# Altium PCB HV_DAC_1PPM.PcbDoc (part 5 of 5)
Units mm, origin at the board's own origin, x right, y up, seen from the top; angles counter-clockwise.
Board outline 148 x 86 mm, 6 copper layers (Layer 1, Layer 2, Layer 3, Layer 4, Layer 5, Layer 6), stack 1.615 mm thick; 392 components, 227 nets, 1037 pads, 645 vias.
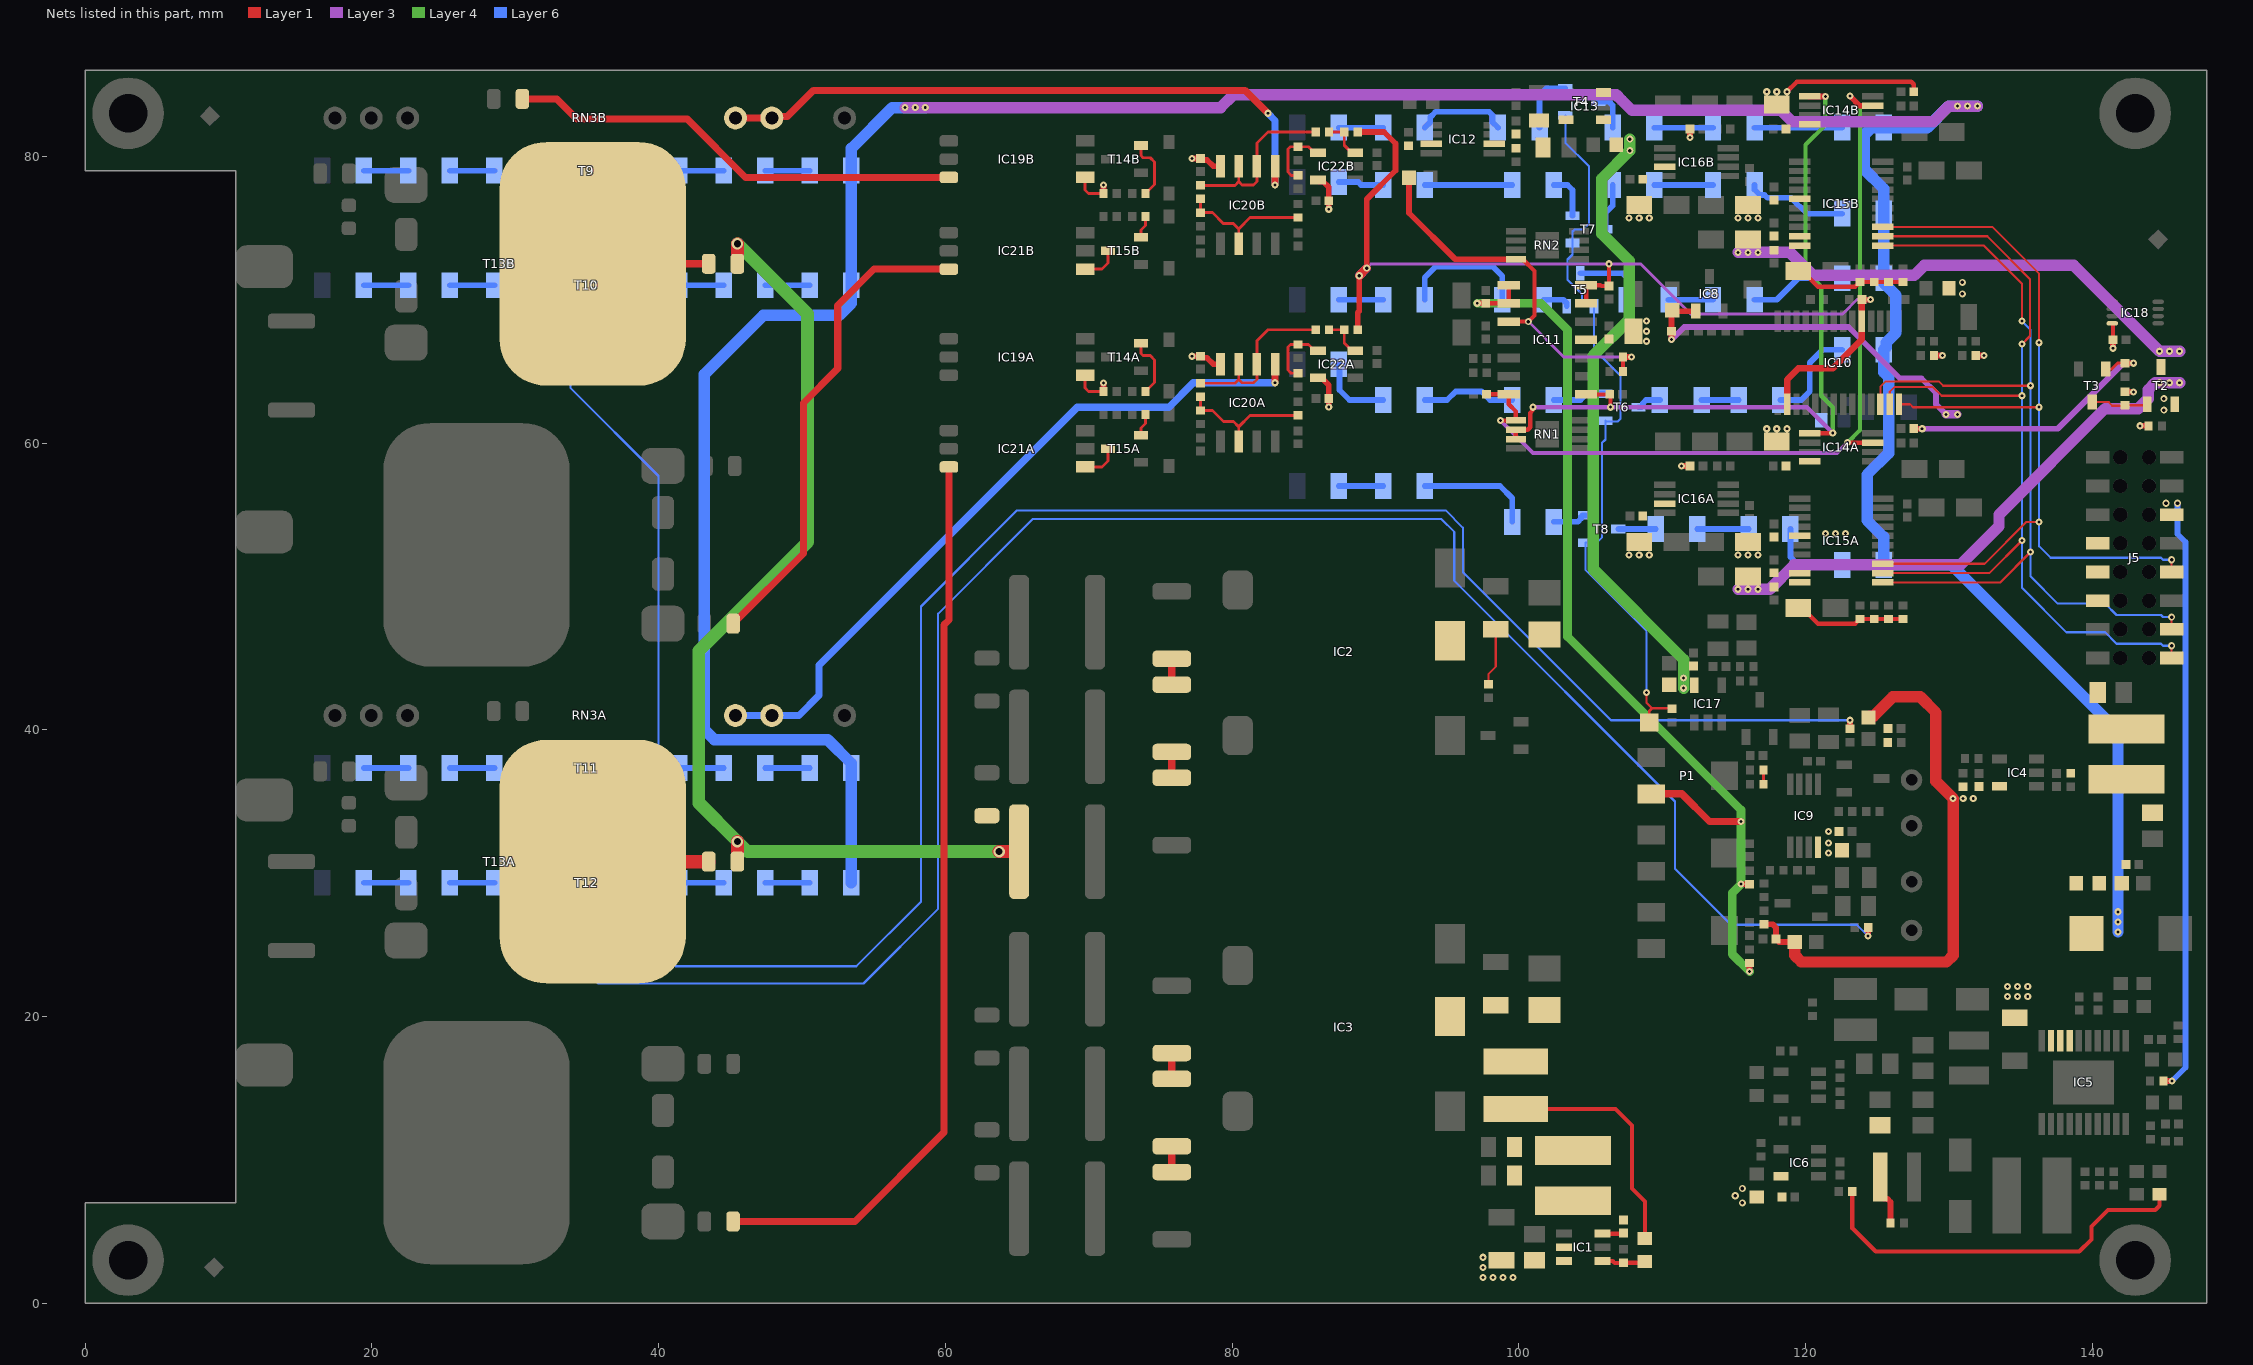
[diagram p7: the nets of this part, all layers, seen from the top]

## Via types
v1: diameter 0.5, hole 0.2, Layer 1 to Layer 6, tented both sides, 520 vias
v2: diameter 0.5, hole 0.25, Layer 1 to Layer 6, tented both sides, 74 vias
v3: diameter 0.8, hole 0.5, Layer 1 to Layer 6, tented both sides, 47 vias
v4: diameter 0.8, hole 0.5, Layer 1 to Layer 6, tented bottom, 2 vias
v5: diameter 0.5, hole 0.25, Layer 1 to Layer 6, tented bottom, 2 vias

## Nets (pads, with @x,y where several pads share a name; then routed paths per layer and width w, separated by ;. In a path a pad name is that pad's centre, name@x,y a point inside that pad or via, vN(x,y) a via of type N, cw(c..) or ccw(c..) an arc to the next point about the centre after c; other vN are vias at no path point) (continued)
NetIC19B_6: IC19B.6 R113B.1 | length 32
  Layer 1 w0.5: R113B.1@30.5,84 32.9,84 34.3,82.6 42,82.6 46.07,78.53 IC19B.6@60.25,78.53
NetIC20A_2: IC20A.2 R114A.2 R117A.1 R123A.2 | length 9.6
  Layer 1 w0.2: R123A.2@77.8,63.23 R114A.2@77.8,62.27 78.63,62.27 79.4,61.5 80.1,61.5 80.465,61.135 ; IC20A.2@80.465,60.1 80.465,61.135 ; R117A.1@84.6,61.93 81.26,61.93 80.465,61.135
NetIC20A_5: IC20A.5 RN3A.4 RN3A.5 | length 49.8
  Layer 1 w0.5: v1@83.005,64.205 IC20A.5@83.005,65.5
  Layer 6 w0.5: RN3A.4@45.36,41 RN3A.5@47.9,41 49.8,41 51.2,42.4 51.2,44.5 69.2,62.5 75.6,62.5 77.3,64.2 v1(83,64.2)
NetIC20A_6: IC20A.6 IC20A.7 R123A.1 R132A.2 | length 12.4
  Layer 1 w0.2: R123A.1@77.8,64.17 80.2,64.17 80.465,64.435 ; IC20A.7@80.465,65.5 80.465,64.435 ; R132A.2@85.83,67.9 82.5,67.9 81.735,67.135 IC20A.6@81.735,65.5 81.735,64.435 81.5,64.2 80.7,64.2 80.465,64.435
NetIC20B_2: IC20B.2 R114B.2 R117B.1 R123B.2 | length 9.6
  Layer 1 w0.2: R123B.2@77.8,77.03 R114B.2@77.8,76.07 78.63,76.07 79.4,75.3 80.1,75.3 80.465,74.935 ; IC20B.2@80.465,73.9 80.465,74.935 ; R117B.1@84.6,75.73 81.26,75.73 80.465,74.935
NetIC20B_5: IC20B.5 RN3B.4 RN3B.5 | length 45.1
  Layer 1 w0.5: RN3B.4@45.36,82.675 RN3B.5@47.9,82.675 48.009,82.784 48.984,82.784 50.8,84.6 80.9,84.6 v1(82.5,83) ; v1(83,78) 83.005,78.005 IC20B.5@83.005,79.3
  Layer 6 w0.5: v1(82.5,83) 83,82.5 v1(83,78)
NetIC20B_6: IC20B.6 IC20B.7 R123B.1 R132B.2 | length 12.4
  Layer 1 w0.2: R123B.1@77.8,77.97 80.2,77.97 80.465,78.235 ; IC20B.7@80.465,79.3 80.465,78.235 ; R132B.2@85.83,81.7 82.5,81.7 81.735,80.935 IC20B.6@81.735,79.3 81.735,78.235 81.5,78 80.7,78 80.465,78.235
NetIC21A_1: IC21A.1 T15A.3 | length 2.6
  Layer 1 w0.2: IC21A.1@69.75,58.33 70.93,58.33 71.35,58.75 T15A.3@71.35,59.6
NetIC21A_6: IC21A.6 R122A.2 | length 63.8
  Layer 1 w0.5: R122A.2@45.2,5.7 53.7,5.7 59.9,11.9 59.9,47.3 60.25,47.65 IC21A.6@60.25,58.33
NetIC21B_1: IC21B.1 T15B.3 | length 2.6
  Layer 1 w0.2: IC21B.1@69.75,72.13 70.93,72.13 71.35,72.55 T15B.3@71.35,73.4
NetIC21B_6: IC21B.6 R122B.2 | length 34
  Layer 1 w0.5: R122B.2@45.2,47.4 50.1,52.3 50.1,62.8 52.5,65.2 52.5,69.6 55.03,72.13 IC21B.6@60.25,72.13
NetIC22A_3: IC22A.3 R132A.1 R134A.1 | length 3
  Layer 1 w0.2: R132A.1@86.77,67.9 R134A.1@87.83,67.9 87.83,66.97 88.35,66.45 IC22A.3@88.6,66.45
NetIC22A_4: IC22A.4 R131A.2 R133A.1 | length 4.7
  Layer 1 w0.2: R133A.1@84.6,64.87 84.13,64.87 83.9,65.1 83.9,66.7 84.07,66.87 R131A.2@84.6,66.87 85.33,66.87 85.75,66.45 IC22A.4@86,66.45
NetIC22B_3: IC22B.3 R132B.1 R134B.1 | length 3
  Layer 1 w0.2: R132B.1@86.77,81.7 R134B.1@87.83,81.7 87.83,80.77 88.35,80.25 IC22B.3@88.6,80.25
NetIC22B_4: IC22B.4 R131B.2 R133B.1 | length 4.7
  Layer 1 w0.2: R133B.1@84.6,78.67 84.13,78.67 83.9,78.9 83.9,80.5 84.07,80.67 R131B.2@84.6,80.67 85.33,80.67 85.75,80.25 IC22B.4@86,80.25
NetR17_1: R17.1 T2.1 T3.3 | length 4
  Layer 1 w0.15: T3.3@140,62.85 141.15,62.85 141.4,62.6 142.27,62.6 R17.1@142.3,62.63 143.78,62.63 T2.1@143.85,62.7
NetR33_1: R33.1 R42.2 | length 6.1
  Layer 6 w0.4: R42.2@116.45,82 R33.1@122.55,82
NetR34_1: R34.1 R43.2 | length 6.7
  Layer 6 w0.4: R43.2@116.45,70 118,70 119.5,71.5 R34.1@122.55,71.5
NetR35_1: R35.1 R44.2 | length 6.9
  Layer 6 w0.4: R44.2@118.25,63 119.7,63 120.3,63.6 120.3,65.6 121.2,66.5 R35.1@122.55,66.5
NetR36_1: R36.1 R45.2 | length 7.1
  Layer 6 w0.4: R45.2@116.45,78 116.45,77.675 116.825,77.3 117.15,77.3 117.35,77.1 119,77.1 120.1,76 R36.1@122.55,76
NetR37_1: R37.1 R46.2 | length 5.8
  Layer 6 w0.4: R46.2@118.95,54 118.95,52.05 119.5,51.5 R37.1@122.55,51.5
NetR38_1: R38.1 R47.2 | length 3.1
  Layer 6 w0.4: R47.2@47.45,79 R38.1@50.55,79
NetR39_1: R39.1 R48.2 | length 3.1
  Layer 6 w0.4: R48.2@47.45,71 R39.1@50.55,71
NetR40_1: R40.1 R49.2 | length 3.1
  Layer 6 w0.4: R49.2@47.45,37.325 R40.1@50.55,37.325
NetR41_1: R41.1 R50.2 | length 3.1
  Layer 6 w0.4: R50.2@47.45,29.325 R41.1@50.55,29.325
NetR42_1: R42.1 R52.2 | length 4.1
  Layer 6 w0.4: R52.2@109.45,82 R42.1@113.55,82
NetR43_1: R43.1 R53.2 | length 3.1
  Layer 6 w0.4: R53.2@110.45,70 R43.1@113.55,70
NetR44_1: R44.1 R54.2 | length 2.6
  Layer 6 w0.4: R54.2@112.75,63 R44.1@115.35,63
NetR45_1: R45.1 R55.2 | length 4.1
  Layer 6 w0.4: R55.2@109.45,78 R45.1@113.55,78
NetR46_1: R46.1 R56.2 | length 3.6
  Layer 6 w0.4: R56.2@112.45,54 R46.1@116.05,54
NetR47_1: R47.1 R57.2 | length 3.1
  Layer 6 w0.4: R57.2@41.45,79 R47.1@44.55,79
NetR48_1: R48.1 R58.2 | length 3.1
  Layer 6 w0.4: R58.2@41.45,71 R48.1@44.55,71
NetR49_1: R49.1 R59.2 | length 3.1
  Layer 6 w0.4: R59.2@41.45,37.325 R49.1@44.55,37.325
NetR50_1: R50.1 R60.2 | length 3.1
  Layer 6 w0.4: R60.2@41.45,29.325 R50.1@44.55,29.325
NetR52_1: R52.1 T4.3 | length 2.7
  Layer 6 w0.4: T4.3@105.55,83.8 106.316,83.8 106.55,83.566 R52.1@106.55,82
NetR53_1: R53.1 T5.3 | length 4.9
  Layer 6 w0.4: T5.3@104.3,71.85 107.25,71.85 107.399,71.7 107.55,71.55 R53.1@107.55,70
NetR54_1: R54.1 T6.3 | length 1.8
  Layer 6 w0.4: T6.3@108.35,62.5 108.55,62.5 108.65,62.6 108.65,62.766 108.884,63 R54.1@109.85,63
NetR55_1: R55.1 T7.3 | length 3.3
  Layer 6 w0.4: T7.3@106.05,74.9 106.05,76.05 106.55,76.55 R55.1@106.55,78
NetR56_1: R56.1 T8.3 | length 2.6
  Layer 6 w0.4: T8.3@106.95,54 R56.1@109.55,54
NetR57_1: R57.1 T9.3 | length 2.4
  Layer 6 w0.4: T9.3@36.15,79 R57.1@38.55,79
NetR58_1: R58.1 T10.3 | length 2.4
  Layer 6 w0.4: T10.3@36.15,71 R58.1@38.55,71
NetR59_1: R59.1 T11.3 | length 2.4
  Layer 6 w0.4: T11.3@36.15,37.325 R59.1@38.55,37.325
NetR60_1: R60.1 T12.3 | length 2.4
  Layer 6 w0.4: T12.3@36.15,29.325 R60.1@38.55,29.325
NetR63_2: R63.2 T4.1 T5.1 T6.1 T7.1 T8.1 TP3.1 | length 51.4
  Layer 1 w0.15: v1(108.9,42.6) 108.9,41.9 109.3,41.5
  Layer 1 w0.2: TP3.1@109.1,40.5 109.1,41.3 109.3,41.5 110.67,41.5 R63.2@110.7,41.47
  Layer 6 w0.15: T4.1@103.25,82.85 103.25,80.95 104.9,79.3 104.9,75.3 104.5,74.9 103.9,74.9 103.75,74.75 T7.1@103.75,73.95 103.75,73.15 103.4,72.8 103.4,71.4 104.2,70.6 104.4,70.4 104.4,69.8 104.65,69.55 T5.1@105.25,69.55 105.25,66.55 107.1,64.7 107.1,61.7 106.9,61.5 106.1,61.5 T6.1@106.05,61.55 106.05,60.25 105.8,60 105.8,53.4 105.45,53.05 T8.1@104.65,53.05 104.65,51.15 108.9,46.9 v1(108.9,42.6)
NetR65_1: R65.1 R74.2 | length 6.5
  Layer 6 w0.4: R74.2@93.45,82 93.825,82.375 93.825,82.725 94.2,83.1 97.941,83.1 98.175,82.866 98.175,82.375 R65.1@98.55,82
NetR65_2: R65.2 T4.2 | length 4.3
  Layer 6 w0.4: R65.2@101.45,82 101.45,84.25 101.95,84.75 T4.2@103.25,84.75
NetR66_1: R66.1 R75.2 | length 9.2
  Layer 6 w0.4: R75.2@93.45,70 93.45,71.55 94.2,72.3 98.2,72.3 98.85,71.65 R66.1@98.85,70
NetR66_2: R66.2 T5.2 | length 1.9
  Layer 6 w0.4: R66.2@101.75,70 103.1,70 103.35,69.75 T5.2@103.35,69.55
NetR67_1: R67.1 R76.2 | length 6.6
  Layer 6 w0.4: R76.2@93.45,63 95,63 95.6,63.6 97.4,63.6 98,63 R67.1@99.55,63
NetR67_2: R67.2 T6.2 | length 3.8
  Layer 6 w0.4: R67.2@102.45,63 104.3,63 104.75,63.45 T6.2@106.05,63.45
NetR68_1: R68.1 R77.2 | length 6.1
  Layer 6 w0.4: R77.2@93.45,78 R68.1@99.55,78
NetR68_2: R68.2 T7.2 | length 3.2
  Layer 6 w0.4: R68.2@102.45,78 103.4,78 103.75,77.65 T7.2@103.75,75.85
NetR69_1: R69.1 R78.2 | length 8.1
  Layer 6 w0.4: R78.2@93.45,57 98.7,57 99.55,56.15 R69.1@99.55,54.5
NetR69_2: R69.2 T8.2 | length 2.5
  Layer 6 w0.4: R69.2@102.45,54.5 104.116,54.5 104.35,54.734 104.35,54.85 104.45,54.95 T8.2@104.65,54.95
NetR70_1: R70.1 R79.2 | length 3.1
  Layer 6 w0.4: R79.2@25.45,79 R70.1@28.55,79
NetR70_2: R70.2 T9.2 | length 3
  Layer 6 w0.4: R70.2@31.45,79 31.45,79.325 32.075,79.95 T9.2@33.85,79.95
NetR71_1: R71.1 R80.2 | length 3.1
  Layer 6 w0.4: R80.2@25.45,71 R71.1@28.55,71
NetR71_2: R71.2 T10.2 | length 3
  Layer 6 w0.4: R71.2@31.45,71 31.45,71.325 32.075,71.95 T10.2@33.85,71.95
NetR72_1: R72.1 R81.2 | length 3.1
  Layer 6 w0.4: R81.2@25.45,37.325 R72.1@28.55,37.325
NetR72_2: R72.2 T11.2 | length 3
  Layer 6 w0.4: R72.2@31.45,37.325 31.45,37.65 32.075,38.275 T11.2@33.85,38.275
NetR73_1: R73.1 R82.2 | length 3.1
  Layer 6 w0.4: R82.2@25.45,29.325 R73.1@28.55,29.325
NetR73_2: R73.2 T12.2 | length 3
  Layer 6 w0.4: R73.2@31.45,29.325 31.45,29.65 32.075,30.275 T12.2@33.85,30.275
NetR74_1: R74.1 R84.2 | length 3.1
  Layer 6 w0.4: R84.2@87.45,82 R74.1@90.55,82
NetR75_1: R75.1 R85.2 | length 3.1
  Layer 6 w0.4: R85.2@87.45,70 R75.1@90.55,70
NetR76_1: R76.1 R86.2 | length 5.2
  Layer 6 w0.4: R86.2@87.45,65.5 87.5,65.45 87.5,63.7 88.2,63 R76.1@90.55,63
NetR77_1: R77.1 R87.2 | length 3.2
  Layer 6 w0.4: R87.2@87.45,78.2 88.8,78.2 89,78 R77.1@90.55,78
NetR78_1: R78.1 R88.2 | length 3.1
  Layer 6 w0.4: R88.2@87.45,57 R78.1@90.55,57
NetR79_1: R79.1 R89.2 | length 3.1
  Layer 6 w0.4: R89.2@19.45,79 R79.1@22.55,79
NetR80_1: R80.1 R90.2 | length 3.1
  Layer 6 w0.4: R90.2@19.45,71 R80.1@22.55,71
NetR81_1: R81.1 R91.2 | length 3.1
  Layer 6 w0.4: R91.2@19.45,37.325 R81.1@22.55,37.325
NetR82_1: R82.1 R92.2 | length 3.1
  Layer 6 w0.4: R92.2@19.45,29.325 R82.1@22.55,29.325
NetR83_1: R83.1 R93.2 | length 1
  Layer 1 w0.2: R93.2@117.07,36.2 R83.1@117.07,37.2
NetR112A_1: R112A.1 T13A.3 | length 8.1
  Layer 1 w0.95: T13A.3@35.4,30.8 R112A.1@43.5,30.8
NetR112B_1: R112B.1 T13B.3 | length 8.1
  Layer 1 w0.5: T13B.3@35.4,72.5 R112B.1@43.5,72.5
NetR116A_2: R116A.2 T14A.2 | length 4.3
  Layer 1 w0.2: T14A.2@73.65,66.95 73.65,66.25 73.8,66.1 74.3,66.1 74.6,65.8 74.6,64.23 74.18,63.81 74.16,63.81 73.97,63.62 R116A.2@73.97,63.6
NetR116B_2: R116B.2 T14B.2 | length 4.3
  Layer 1 w0.2: T14B.2@73.65,80.75 73.65,80.05 73.8,79.9 74.3,79.9 74.6,79.6 74.6,78.03 74.18,77.61 74.16,77.61 73.97,77.42 R116B.2@73.97,77.4
NetR120A_1: R120A.1 T15A.2 | length 1.6
  Layer 1 w0.2: T15A.2@73.65,60.55 73.65,61.05 73.97,61.37 R120A.1@73.97,62
NetR120B_1: R120B.1 T15B.2 | length 1.6
  Layer 1 w0.2: T15B.2@73.65,74.35 73.65,74.85 73.97,75.17 R120B.1@73.97,75.8
NetR125_2: R125.2 R126.1 | length 1.8
  Layer 1 w0.5: R125.2@75.8,36.65 R126.1@75.8,38.45
NetR126_2: R126.2 R127.1 | length 1.8
  Layer 1 w0.5: R126.2@75.8,43.15 R127.1@75.8,44.95
NetR128_2: R128.2 R129.1 | length 1.8
  Layer 1 w0.5: R128.2@75.8,9.15 R129.1@75.8,10.95
NetR129_2: R129.2 R130.1 | length 1.8
  Layer 1 w0.5: R129.2@75.8,15.65 R130.1@75.8,17.45
NetR143_2: R143.2 T9.1 T10.1 | length 174.5
  Layer 1 w0.4: R143.2@123.1,40.07 v1(123.1,40.66)
  Layer 6 w0.15: T9.1@33.85,78.05 33.85,75.525 34.9,74.475 34.9,70.375 34.575,70.05 T10.1@33.85,70.05 33.85,63.85 40,57.7 40,24.7 41.2,23.5 53.8,23.5 58.3,28 58.3,48.597 65.003,55.3 94.897,55.3 96.1,54.097 96.1,51 106.44,40.66 v1(123.1,40.66)
NetR144_2: R144.2 T11.1 T12.1 | length 147.6
  Layer 1 w0.4: v1(124.37,25.61) R144.2@124.37,26.2
  Layer 6 w0.15: T11.1@33.85,36.375 33.85,33.85 34.9,32.8 34.9,28.7 34.575,28.375 T12.1@33.85,28.375 33.85,24.25 35.8,22.3 54.297,22.3 59.5,27.503 59.5,48.1 66.1,54.7 94.6,54.7 95.5,53.8 95.5,50.4 110.9,35 110.9,30.3 114.8,26.4 123.58,26.4 v1(124.37,25.61)
P2kV0: C5.2 R2.2 R112A.2 R112B.2 | length 70.7
  Layer 1 w0.9: R112A.2@45.5,30.8 v3(45.5,32.2) ; R112B.2@45.5,72.5 v3(45.5,73.9) ; v4(63.75,31.5) C5.2@65.15,31.5
  Layer 4 w0.9: v3(45.5,73.9) 50.4,69 50.4,53.1 42.8,45.5 42.8,34.9 v3(45.5,32.2) 46.2,31.5 v4(63.75,31.5)
P3V3: C82.2 IC18.8 J5.11 R8.2 R13.2 R17.2 R94.2 R95.2 R99.1 T2.2 | length 45.6
  Layer 1 w0.3: IC18.8@141.4,68.35 141.45,68.35 C82.2@141.45,67.2
  Layer 1 w0.4: R95.2@128.97,66.1 v1(129.56,66.1) ; R94.2@131.87,66.1 v1(132.46,66.1) ; v1(141.45,66.61) C82.2@141.45,67.2 ; R17.2@142.3,63.57 v1(142.89,63.57) ; v1(143.34,61.2) R8.2@143.93,61.2 ; R13.2@144.97,15.5 v1(145.56,15.5)
  Layer 6 w0.4: v1(145.56,15.5) 146.5,16.44 146.5,53.1 145.95,53.65 v2@145.95,55.773
  other v2: 145.15,55.8 145.95,55.8 145,62.3 145,63.1 130.95,70.4 130.95,71.2
P3V3_DAC: C73A.1 C73B.1 C74A.1 C74B.1 C78A.2 C78B.2 C79A.2 C79B.2 IC15A.9 IC15A.10 IC15B.9 IC15B.10 R108A.2 R108B.2 R109A.2 R109B.2 R110A.2 R110B.2 R111A.2 R111B.2 T2.3 | length 87.6
  Layer 1 w0.3: C73A.1@119.5,48.5 119.775,48.5 120.875,47.4 123.464,47.4 123.64,47.576 123.64,47.59 123.78,47.73 R110A.2@123.8,47.73 R109A.2@124.8,47.73 R111A.2@125.8,47.73 R108A.2@126.8,47.73 ; C73B.1@119.5,72 119.775,72 120.875,70.9 123.464,70.9 123.64,71.076 123.64,71.09 123.78,71.23 R110B.2@123.8,71.23 R109B.2@124.8,71.23 R111B.2@125.8,71.23 R108B.2@126.8,71.23
  Layer 3 w0.8: v1(115.3,49.8) v1(116,49.8) v1(116.7,49.8) 117.5,49.8 119.2,51.5 130.8,51.5 133.5,54.2 133.5,55 140.9,62.4 143.2,62.4 143.9,63.1 143.9,63.7 144.4,64.2 v1(144.7,64.2) v1(145.4,64.2) v1(146.1,64.2) ; v1(115.3,73.3) v1(116,73.3) v1(116.7,73.3) 118.9,73.3 120.5,71.7 127.6,71.7 128.3,72.4 138.7,72.4 v1(144.7,66.4) v1(145.4,66.4) v1(146.1,66.4)
P5V0: C9.2 C10.2 L1.2 L2.1 R3.2 | length 16.8
  Layer 1 w0.3: L2.1@99.8,13.55 106.75,13.55 107.9,12.4 107.9,8 108.8,7.1 R3.2@108.8,4.5
P5V0_BST: C1.1 IC1.6 | length 1.5
  Layer 1 w0.3: IC1.6@105.85,4.85 107.25,4.85 C1.1@107.3,4.9
P5V0_FB: IC1.4 R3.1 R5.2 | length 3.1
  Layer 1 w0.3: IC1.4@105.85,2.95 106.55,2.95 106.7,2.8 107.27,2.8 R5.2@107.3,2.83 108.73,2.83 R3.1@108.8,2.9
P5V0_LC: C2.1 C11.2 C15.1 C16.2 IC2.2 IC3.2 L2.2 R4.1 | length 4
  Layer 1 w0.15: R4.1@97.9,43.17 97.9,43.9 98.4,44.4 C11.2@98.4,47
P5V0_REF: C59.2 IC11.10 IC12.7 R101.1 R103.1 R104.2 RN2.4 | length 27.8
  Layer 1 w0.3: IC11.10@99.3,68.47 v2(100.67,68.47) 101.1,68.9 101.1,72 100.275,72.825 RN2.4@99.8,72.825 ; R103.1@107.27,65 R101.1@107.27,66
  Layer 1 w0.4: C59.2@92.35,78.5 92.35,76.05 95.575,72.825 RN2.4@99.8,72.825 ; R101.1@107.27,66 v1(107.86,66)
  Layer 3 w0.2: v2(100.67,68.47) 103.14,66 v1(107.86,66)
P5V0_SW: C1.2 IC1.2 L1.1
P5V0A: C18.2 C37.2 C39.2 C95.2 C96.2 C97.2 C98.2 IC4.5 IC8.1 R10.2 R98.2 R137.2 R138.2 | length 65.7
  Layer 1 w0.4: v1(110.65,67.21) C39.2@110.65,67.8 110.65,69.2 C37.2@110.7,69.25 110.75,69.2 IC8.1@112.35,69.2 ; R138.2@117.1,26.43 117.716,26.43 117.95,26.196 C98.2@117.95,25.4 118.15,25.2 C96.2@119.25,25.2
  Layer 1 w0.8: C96.2@119.25,25.2 119.25,24.269 119.719,23.8 129.831,23.8 130.3,24.269 v1(130.3,35.2) 129.1,36.4 129.1,41.2 128,42.3 126.1,42.3 124.75,40.95 124.5,40.95 C95.2@124.4,40.85
  Layer 3 w0.4: v1(110.65,67.21) 111.54,68.1 123,68.1 126.6,64.5 128.1,64.5 129.1,63.5 129.1,62.7 v1(129.8,62)
  Layer 3 w0.6: v1(129.8,62) v1(130.6,62)
  other v1: 131,35.2 131.7,35.2 121.4,53.7 122.1,53.7 122.8,53.7
P6V8: C53.2 C57.2 IC12.2 IC13.5 R100.2 R105.1
P12V0: C7.2 C8.2 C29.2 C42.2 C43.2 C54.2 C56.2 C99.2 C101.2 IC1.3 IC5.17 IC5.18 IC5.19 IC9.8 IC13.1 IC13.3 IC17.5 L3.2 L8.1 R9.1 | length 43.5
  Layer 4 w0.8: v2(107.75,81.2) v2(107.75,80.4) 105.8,78.45 105.8,74.6 107.7,72.7 107.7,68.6 105.2,66.1 105.2,51.2 111.5,44.9 v1(111.5,43.6) v1(111.5,42.9)
  other v1: 97.5,1.8 98.2,1.8 98.9,1.8 99.6,1.8 97.5,2.5 97.5,3.2 134.1,21.4 134.8,21.4 135.5,21.4 134.1,22.1 134.8,22.1 135.5,22.1 121.6,31.4 121.6,32.1 121.6,32.9
P12V0_HEAT: C34.1 C35.2 C36.2 L8.2 R33.2 R34.2 R35.2 R36.2 R37.2 R38.2 R39.2 R40.2 R41.2 | length 226.6
  Layer 3 w0.8: v1(57.2,83.4) v1(58.6,83.4) 79.2,83.4 80.1,84.3 106.8,84.3 107.2,83.9 107.9,83.2 118.3,83.2 119.1,82.4 128.9,82.4 130,83.5 v1(130.6,83.5) v1(131.3,83.5) v1(132,83.5)
  Layer 6 w0.8: R41.2@53.45,29.325 R40.2@53.45,37.325 53.45,37.65 51.8,39.3 43.9,39.3 43.2,40 43.2,64.8 47.3,68.9 52.6,68.9 53.45,69.75 R39.2@53.45,71 R38.2@53.45,79 53.45,80.55 56.3,83.4 v1(57.2,83.4) v1(58.6,83.4) ; v1(132,83.5) v1(131.3,83.5) v1(130.6,83.5) 130,83.5 128.5,82 R33.2@125.45,82 124.6,82 124.1,81.5 124.1,79.1 125.45,77.75 R36.2@125.45,76 R34.2@125.45,71.5 125.45,71.175 125.625,71 126.3,70.325 126.3,67.675 125.625,67 125.625,66.675 R35.2@125.45,66.5 125.45,64.95 125.8,64.6 125.8,59.3 124.3,57.8 124.3,54.6 125.45,53.45 R37.2@125.45,51.5 130.2,51.5 141.8,39.9 v1(141.8,27.3) v1(141.8,26.6) v1(141.8,25.9)
  other v1: 57.9,83.4
P12V0_IN: C6.2 J5.6 J5.8 J5.10 L3.1
P14V0: C25.2 C51.1 C52.2 C63A.1 C63B.1 C64A.1 C64B.1 C66A.2 C66B.2 C67A.2 C67B.2 C69A.2 C69B.2 C70A.2 C70B.2 C72A.1 C72B.1 C75A.2 C75B.2 C80A.2 C80B.2 C86A.2 C86B.2 IC6.5 IC11.4 IC14A.8 IC14B.8 IC15A.5 IC15B.5 IC16A.7 IC16B.7 IC19A.1 IC19B.1 IC20A.8 IC20B.8 IC22A.5 IC22B.5 R16.2 R23.1 R115A.2 R115B.2 T3.1 | length 45.4
  Layer 1 w0.2: IC19A.1@69.75,64.73 69.75,63.85 70,63.6 R115A.2@71.03,63.6 ; IC19B.1@69.75,78.53 69.75,77.65 70,77.4 R115B.2@71.03,77.4 ; T3.1@140.95,65.15 141.35,65.15 141.77,65.57 R23.1@142.3,65.57
  Layer 1 w0.3: v1(118.7,84.5) 119.4,85.2 127.374,85.2 127.55,85.024 C69B.2@127.55,84.5
  Layer 1 w0.4: R115A.2@71.03,63.6 v1(71.03,64.19) ; R115B.2@71.03,77.4 v1(71.03,77.99) ; v1(77.21,66.05) C80A.2@77.8,66.05 77.91,65.94 78.26,65.94 78.7,65.5 IC20A.8@79.195,65.5 ; v1(77.21,79.85) C80B.2@77.8,79.85 77.91,79.74 78.26,79.74 78.7,79.3 IC20B.8@79.195,79.3 ; IC22A.5@86,64.55 86.1,64.45 86.35,64.45 86.75,64.05 C86A.2@86.75,63.1 v1(86.75,62.51) ; IC22B.5@86,78.35 86.1,78.25 86.35,78.25 86.75,77.85 C86B.2@86.75,76.9 v1(86.75,76.31) ; v1(111.36,58.4) C70A.2@111.95,58.4 ; v1(111.95,81.31) C70B.2@111.95,81.9 ; C69A.2@127.55,61 v1(128.14,61) ; R23.1@142.3,65.57 v1(142.89,65.57)
  Layer 3 w0.4: v1(128.14,61) 137.6,61 142.17,65.57 v1(142.89,65.57)
  other v1: 107.7,52.2 108.4,52.2 109.1,52.2 115.3,52.2 116,52.2 116.7,52.2 117.3,61 118,61 118.7,61 108.9,67.1 108.9,67.8 108.9,68.5 107.7,75.7 108.4,75.7 109.1,75.7 115.3,75.7 116,75.7 116.7,75.7 117.3,84.5 118,84.5
  other v2: 115.6,7 115.6,8
  other v5: 115.1,7.5
P15V0: C22.2 L5.2 R12.2 R15.1 R20.2 | length 30.9
  Layer 1 w0.3: R15.1@123.27,7.8 123.27,5.23 124.9,3.6 139.1,3.6 139.95,4.45 139.95,5.35 141.1,6.5 144.4,6.5 144.7,6.8 R20.2@144.7,7.6
  Layer 1 w0.4: L5.2@125.215,8.8 125.215,7.59 125.515,7.291 125.707,7.291 125.93,7.067 R12.2@125.93,5.6
SPI_CLK: IC10.28 IC15A.13 IC15B.13 J5.7 | length 63.7
  Layer 1 w0.15: IC15A.13@125.4,51.575 132.494,51.575 135.419,54.5 v1(136.3,54.5) ; IC15B.13@125.4,75.075 133.025,75.075 136.3,71.8 v1(136.3,67) ; IC10.28@126.525,62.7 127.3,62.7 127.5,62.5 v1(136.3,62.5) ; J5.7@145.539,51.004 v2(145.539,51.861)
  Layer 6 w0.15: v1(136.3,67) v1(136.3,54.5) 136.3,52.8 137.1,52 144.8,52 144.939,51.861 v2(145.539,51.861)
SPI_MISO: IC10.26 IC15A.11 IC15B.11 J5.3 | length 66.5
  Layer 1 w0.15: IC10.26@125.225,62.7 125.225,63.925 125.6,64.3 129.3,64.3 129.6,64 v1(135.7,64) ; IC15A.11@125.4,50.275 133.575,50.275 v1(135.7,52.4) ; IC15B.11@125.4,73.775 132.425,73.775 135.1,71.1 v1(135.1,68.5) ; J5.3@145.539,47.004 v2(145.539,47.861)
  Layer 6 w0.15: v1(135.1,68.5) 135.7,67.9 v1(135.7,52.4) 135.7,50.7 137.6,48.8 140.9,48.8 141.7,48 144.8,48 144.939,47.861 v2(145.539,47.861)
SPI_MOSI: IC10.27 IC15A.12 IC15B.12 J5.1 | length 67.4
  Layer 1 w0.15: IC15A.12@125.4,50.925 132.825,50.925 v1(135.1,53.2) ; IC15B.12@125.4,74.425 132.675,74.425 135.666,71.434 135.666,67.466 v1(135.1,66.9) ; IC10.27@125.875,62.7 125.875,63.575 126.2,63.9 128.9,63.9 129.5,63.3 v1(135.1,63.3) ; J5.1@145.539,45.004 v2(145.539,45.861)
  Layer 6 w0.15: v1(135.1,66.9) v1(135.1,53.2) 135.1,49.9 138.2,46.8 140.9,46.8 141.7,46 144.8,46 144.939,45.861 v2(145.539,45.861)
VREF_10V0_N: C62.2 IC11.14 IC14A.3 IC14B.3 RN1.5 | length 58.6
  Layer 1 w0.3: C62.2@97.75,63.4 99.29,63.4 IC11.14@99.3,63.39 99.3,62.7 99.8,62.2 RN1.5@99.8,61.575 v1(98.725,61.575) ; v1(122.925,60.025) IC14A.3@124.7,60.025
  Layer 1 w0.4: v1(123.1,84.2) 123.775,83.525 IC14B.3@124.7,83.525
  Layer 3 w0.3: v1(98.725,61.575) 101,59.3 122.2,59.3 v1(122.925,60.025)
  Layer 4 w0.3: v1(122.925,60.025) 123.8,60.9 123.8,83.5 v1(123.1,84.2)
VREF_10V0_P: C55.2 IC11.1 IC14A.5 IC14B.5 RN1.6 RN1.7 | length 54.9
  Layer 1 w0.3: RN1.7@99.8,60.275 RN1.6@99.8,60.925 100.624,60.925 100.8,61.101 100.8,61.226 100.8,62.1 100.962,62.262 100.962,62.462 v1(101,62.5) ; IC11.1@104.7,63.39 106.34,63.39 106.4,63.33 v1(106.4,62.5) ; IC14A.5@120.3,60.675 121.875,60.675 v1(121.9,60.7)
  Layer 1 w0.4: IC14B.5@120.3,84.175 v1(121.39,84.175)
  Layer 3 w0.3: v1(101,62.5) 120.1,62.5 v1(121.9,60.7)
  Layer 4 w0.3: v1(121.39,84.175) 121.39,82.19 120,80.8 120,72 121.1,70.9 121.1,63.3 121.9,62.5 v1(121.9,60.7)
VREF_P2V5: C45.2 C68.2 IC10.5 IC10.16 IC11.6 IC11.7 R134A.2 R134B.2 | length 70.8
  Layer 1 w0.3: IC11.6@104.7,69.74 IC11.7@104.7,71.01 105.69,71.01 105.75,70.95 C68.2@106.3,70.95 v1(106.3,72.5)
  Layer 1 w0.4: R134A.2@88.77,67.9 88.77,69.1 88.87,69.2 v2(88.87,71.67) ; R134B.2@88.77,81.7 90.6,81.7 91.4,80.9 91.4,79 89.4,77 v2(89.4,72.2) ; C45.2@123.95,70 v1(124.54,70)
  Layer 1 w0.45: IC10.16@118.725,62.7 118.725,64.425 119.5,65.2 121.9,65.2 123.925,67.225 IC10.5@123.925,68.5 123.925,69.975 C45.2@123.95,70
  Layer 1 w0.6: v2(88.87,71.67) v2(89.4,72.2)
  Layer 3 w0.2: v2(89.4,72.2) 89.7,72.5 v1(106.3,72.5) 108.5,72.5 112,69 122.6,69 123.6,70 v1(124.54,70)
  Layer 3 w0.6: v2(88.87,71.67) v2(89.4,72.2)
VREF_P5V0: C65.2 IC11.8 IC11.9 P1.3 R145.2 R146.2 | length 69.3
  Layer 1 w0.3: C65.2@97.7,69.75 97.71,69.74 IC11.9@99.3,69.74 IC11.8@99.3,71.01
  Layer 1 w0.4: v1(97.11,69.75) C65.2@97.7,69.75 ; v1(115.51,29.23) R145.2@116.1,29.23 ; v1(116.1,23.14) R146.2@116.1,23.73
  Layer 1 w0.5: P1.3@109.25,35.53 111.37,35.53 113.3,33.6 v1(115.5,33.6)
  Layer 4 w0.6: v1(97.11,69.75) 101.55,69.75 103.4,67.9 103.4,46.5 115.5,34.4 v1(115.5,33.6) 115.5,29.24 v1(115.51,29.23) 114.9,28.62 114.9,24.34 v1(116.1,23.14)
pads on no net: B1.1 B2.1 B3.1 B4.1 FTG1.1 FTG2.1 FTG3.1 FTG4.1 FTG5.1 FTG6.1 IC1.5 IC5.21 IC10.7 IC10.8 IC10.17 IC10.18 IC16A.1 IC16A.5 IC16A.8 IC16B.1 IC16B.5 IC16B.8 IC18.3 IC19A.2 IC19B.2 IC21A.2 IC21B.2 J5.M1 J5.M2 J5.M3 J5.M4 J5.M5 J5.M6 J5.M7 J5.M8 J5.M9 J5.M10 J5.M11 J5.M12 J5.M13 J5.M14 J5.M15 J5.M16 RN2.1 RN2.2 RN2.7 RN2.8

## Polygon pours and split planes (outlines as drawn)
GND on Layer 1 "Layer 1-GND 1" (solid, pour order 224): 79.343,37.543 79.635,37.25 81.155,37.25 81.453,37.548 81.453,41.647 81.16,41.94 79.64,41.94 79.343,41.642 79.343,38.7
GND on Layer 1 "GND_L01_P221" (solid, pour order 221): 81.453,21.753 80.9,21.2 78.9,21.2 78.4,21.7 78.4,25.4 78.9,25.9 80.9,25.9 81.453,25.347
GND on Layer 1 "GND_L01_P220" (solid, pour order 220): 76.863,32.525 76.863,30.462 76.6,30.2 75,30.2 74.738,30.463 74.738,32.525
GND on Layer 1 "GND_L01_P219" (solid, pour order 219): 74.738,21.575 74.738,23.638 75,23.9 76.6,23.9 76.863,23.637 76.863,21.575
GND on Layer 1 "GND_L01_P218" (solid, pour order 218): 69.75,44.55 71.95,44.55 72.2,44.8 72.2,50.2 71.95,50.45 69.75,50.45
GND on Layer 1 "GND_L01_P217" (solid, pour order 217): 69.75,36.55 71.95,36.55 72.2,36.8 72.2,42.2 71.95,42.45 69.75,42.45
GND on Layer 1 "GND_L01_P216" (solid, pour order 216): 69.75,28.55 71.95,28.55 72.2,28.8 72.2,34.2 71.95,34.45 69.75,34.45
GND on Layer 1 "GND_L01_P215" (solid, pour order 215): 69.75,19.65 71.95,19.65 72.2,19.9 72.2,25.3 71.95,25.55 69.75,25.55
GND on Layer 1 "GND_L01_P214" (solid, pour order 214): 69.75,11.65 71.95,11.65 72.2,11.9 72.2,17.3 71.95,17.55 69.75,17.55
GND on Layer 1 "GND_L01_P213" (solid, pour order 213): 69.75,3.65 71.95,3.65 72.2,3.9 72.2,9.3 71.95,9.55 69.75,9.55
P5V0A on Layer 1 "P5V0A_L01_P210" (solid, pour order 210): 125.44,38.79 125.44,39.81 124.9,40.35 123.9,40.35 123.9,42.1 124.2,42.4 125.7,42.4 126.2,41.9 126.2,40.55 126.06,40.41 126.06,38.79
GND on Layer 1 "GND_L01_P209" (solid, pour order 209): 141.625,43.325 141.625,41.875 143.275,41.875 143.4,42 143.4,43.2 143.275,43.325
P3V3_DAC on Layer 1 "P3V3_DAC_L01_P208" (solid, pour order 208): 144.4,63.8 144.2,64 144.2,66.6 144.4,66.8 146.3,66.8 146.5,66.6 146.5,64 146.3,63.8 145.4,63.8
GND on Layer 1 "GND_L01_P207" (solid, pour order 207): 98.425,11.6 98.425,8.2 96.8,8.2 96.7,8.3 96.7,11.5 96.8,11.6
P12V0 on Layer 1 "P12V0_L01_P206" (solid, pour order 206): 111.47,44.07 111.47,44.57 111.66,44.76 112.51,44.76 112.55,44.72 112.55,42.55 110.1,42.55 110,42.65 110,43.65 111.05,43.65
P12V0 on Layer 1 "P12V0_L01_P205" (solid, pour order 205): 123.05,31.1 123,31.05 120.65,31.05 120.65,32.95 120.91,33.21 122.66,33.21 122.66,32.49 123.05,32.1
GND on Layer 1 "GND_L01_P203" (solid, pour order 203): 84.29,77.44 84.91,77.44 85.54,76.81 85.54,76.59 86.16,76.59 86.16,77.54 85.9,77.8 85.3,77.8 85.08,78.02 84.29,78.02
GND on Layer 1 "Layer 1-GND_HV" (solid, pour order 202): 11.3,52.3 11.3,55.3 11.5,55.5 11.5,56 11.9,56.4 14.3,56.4 14.7,56 14.7,51.6 14.3,51.2 11.9,51.2 11.5,51.6 11.5,52.1
NetC3_2 on Layer 1 "NETC3_2_L01_P201" (solid, pour order 201): 62.025,45.263 62.288,45.525 64.125,45.525 64.45,45.85 64.45,50.45 64.8,50.8 65.5,50.8 65.85,50.45 65.85,44.55 65.5,44.2 64.05,44.2 63.775,44.475 62.288,44.475 62.025,44.738
P2kV0 on Layer 1 "P2KV0_L01_P200" (solid, pour order 200): 62.025,33.737 62.288,33.475 64.125,33.475 64.45,33.15 64.45,28.55 64.8,28.2 65.5,28.2 65.85,28.55 65.85,34.45 65.5,34.8 64.05,34.8 63.775,34.525 62.288,34.525 62.025,34.263
N2kV0 on Layer 1 "N2KV0_L01_P199" (solid, pour order 199): 62.025,20.363 62.288,20.625 64.125,20.625 64.45,20.95 64.45,25.55 64.8,25.9 65.5,25.9 65.85,25.55 65.85,19.65 65.5,19.3 64.05,19.3 63.775,19.575 62.288,19.575 62.025,19.837
NetC4_2 on Layer 1 "Layer 1-NetC4_2" (solid, pour order 198): 24 vertices, not listed, extent 62.025,36.2 65.85,42.8
P3V3 on Layer 1 "P3V3_L01_P197" (solid, pour order 197): 146.45,62.15 146.3,62 144.8,62 144.6,62.2 144.6,63.2 144.8,63.4 146.3,63.4 146.45,63.25
GND on Layer 1 "Layer 1-GND" (solid, pour order 195): 23 vertices, not listed, extent 99.49,79.9 106.425,83.82
P3V3 on Layer 1 "P3V3_L01_P194" (solid, pour order 194): 144.714,54.559 144.714,55.864 144.95,56.1 146.15,56.1 146.364,55.886 146.364,54.559
GND on Layer 1 "GND_L01_P193" (solid, pour order 193): 144.714,56.559 144.714,57.864 144.95,58.1 146.15,58.1 146.364,57.886 146.364,56.559
GND on Layer 1 "GND_L01_P192" (solid, pour order 192): 139.564,58.559 139.564,59.864 139.8,60.1 141,60.1 141.214,59.886 141.214,58.559
GND on Layer 1 "GND_L01_P191" (solid, pour order 191): 139.564,56.559 139.564,57.864 139.8,58.1 141,58.1 141.214,57.886 141.214,56.559
GND on Layer 1 "GND_L01_P190" (solid, pour order 190): 139.564,46.559 139.564,47.864 139.8,48.1 141,48.1 141.214,47.886 141.214,46.559
GND on Layer 1 "GND_L01_P189" (solid, pour order 189): 139.564,44.559 139.564,45.864 139.8,46.1 141,46.1 141.214,45.886 141.214,44.559
P5V0A on Layer 1 "P5V0A_L01_P188" (solid, pour order 188): 129.858,36.358 129.75,36.25 129.3,35.8 129.3,35.1 129.9,34.5 131.756,34.5 132.996,35.74 134.028,35.74 134.046,35.758 134.046,36.358
P12V0 on Layer 1 "P12V0_L01_P186" (solid, pour order 186): 25 vertices, not listed, extent 133.7,17.55 145.05,37.55
P12V0_HEAT on Layer 1 "P12V0_HEAT_L01_P185" (solid, pour order 185): 138.425,24.575 141.875,24.575 142.55,25.25 142.55,30.18 142.66,30.29 142.66,30.91 140.71,30.91 140.025,30.225 140.025,28.725 138.425,27.125 138.425,27.025
GND on Layer 1 "GND_L01_P184" (solid, pour order 184): 142.94,30.91 143.475,31.445 143.475,32.975 146.625,32.975 146.975,32.625 146.975,24.575 143.525,24.575 143.05,25.05 143.05,29.8 142.94,29.91
NetC58_2 on Layer 1 "NETC58_2_L01_P183" (solid, pour order 183): 92.61,81.38 92.69,81.3 94.65,81.3 94.65,81.75 93.054,81.75 92.875,81.929 92.875,84.3 91.925,84.3 91.925,82.025 91.99,81.96 91.99,81.38
P5V0_REF on Layer 1 "P5V0_REF_L01_P182" (solid, pour order 182): 92.07,81.1 94.65,81.1 94.65,80.65 92.82,80.65 92.61,80.44 92.61,79.99 92.85,79.75 92.85,78 91.85,78 91.85,80.88
GND on Layer 1 "GND_L01_P181" (solid, pour order 181): 27 vertices, not listed, extent 93.15,78 99.05,84.3
P6V8 on Layer 1 "P6V8_L01_P180" (solid, pour order 180): 20 vertices, not listed, extent 97.55,79.9 103.825,82.975
P12V0 on Layer 1 "P12V0_L01_P179" (solid, pour order 179): 19 vertices, not listed, extent 105.375,80.1 108.1,84.75
P3V3 on Layer 1 "P3V3_L01_P178" (solid, pour order 178): 129.5,71.35 129.65,71.5 131.15,71.5 131.35,71.3 131.35,70.3 131.15,70.1 129.65,70.1 129.5,70.25
GND on Layer 1 "GND_L01_P177" (solid, pour order 177): 110.15,70.25 110,70.4 110,71.9 110.2,72.1 111.2,72.1 111.4,71.9 111.4,70.4 111.25,70.25
P14V0 on Layer 1 "Layer 1-P14V0" (solid, pour order 176): 104.025,66.8 103.925,66.9 103.925,67.5 103.985,67.56 106.96,67.56 107.375,67.975 107.375,68.7 107.475,68.8 109.1,68.8 109.2,68.7 109.2,66.9 109.1,66.8
GND on Layer 1 "GND_L01_P175" (solid, pour order 175): 109.2,69.5 109.1,69.4 107.475,69.4 107.375,69.5 107.375,71.3 107.475,71.4 109.1,71.4 109.2,71.3
N14V0 on Layer 1 "N14V0_L01_P174" (solid, pour order 174): 100,66.7 100.075,66.775 100.075,67.5 100.015,67.56 96.94,67.56 96.625,67.875 96.625,68.6 96.525,68.7 94.9,68.7 94.8,68.6 94.8,66.8 94.9,66.7
GND on Layer 1 "GND_L01_P173" (solid, pour order 173): 94.8,71.2 94.9,71.3 96.525,71.3 96.625,71.2 96.625,69.4 96.525,69.3 94.9,69.3 94.8,69.4
N14V0 on Layer 1 "N14V0_L01_P134" (solid, pour order 134): 126.3,78.1 126.6,77.8 129.7,77.8 129.8,77.9 129.8,79.525 129.7,79.625 127.9,79.625 127.9,79.15 127.41,78.66 126.79,78.66 126.68,78.55 124.65,78.55 124.65,78.1
N14V0 on Layer 1 "N14V0_L01_P133" (solid, pour order 133): 126.3,54.6 126.6,54.3 129.7,54.3 129.8,54.4 129.8,56.025 129.7,56.125 127.9,56.125 127.9,55.65 127.41,55.16 126.79,55.16 126.68,55.05 124.65,55.05 124.65,54.6
GND on Layer 1 "GND_L01_P136" (solid, pour order 136): 130.5,77.8 130.4,77.9 130.4,79.525 130.5,79.625 132.3,79.625 132.4,79.525 132.4,77.9 132.3,77.8
GND on Layer 1 "GND_L01_P135" (solid, pour order 135): 130.5,54.3 130.4,54.4 130.4,56.025 130.5,56.125 132.3,56.125 132.4,56.025 132.4,54.4 132.3,54.3
GND on Layer 1 "GND_L01_P138" (solid, pour order 138): 129.3,57 129.2,57.1 129.2,58.725 129.3,58.825 131.1,58.825 131.2,58.725 131.2,57.1 131.1,57
GND on Layer 1 "GND_L01_P137" (solid, pour order 137): 129.3,80.5 129.2,80.6 129.2,82.225 129.3,82.325 131.1,82.325 131.2,82.225 131.2,80.6 131.1,80.5
GND on Layer 1 "GND_L01_P140" (solid, pour order 140): 116.3,84.8 116.4,84.7 116.4,83.075 116.3,82.975 114.5,82.975 114.4,83.075 114.4,84.7 114.5,84.8
GND on Layer 1 "GND_L01_P139" (solid, pour order 139): 116.3,61.3 116.4,61.2 116.4,59.575 116.3,59.475 114.5,59.475 114.4,59.575 114.4,61.2 114.5,61.3
GND on Layer 1 "GND_L01_P142" (solid, pour order 142): 111.3,84.8 111.4,84.7 111.4,83.075 111.3,82.975 109.5,82.975 109.4,83.075 109.4,84.7 109.5,84.8
GND on Layer 1 "GND_L01_P141" (solid, pour order 141): 111.3,61.3 111.4,61.2 111.4,59.575 111.3,59.475 109.5,59.475 109.4,59.575 109.4,61.2 109.5,61.3
N14V0 on Layer 1 "Layer 1-N14V0" (solid, pour order 144): 112,59.575 112.54,59.035 112.54,57.76 113.45,56.85 115.35,56.85 115.35,57.3 114.95,57.3 114.16,58.09 114.16,59.04 114,59.2 114,61.2 113.9,61.3 112.1,61.3 112,61.2
N14V0 on Layer 1 "Layer 1-N14V0 1" (solid, pour order 143): 112,83.075 112.54,82.535 112.54,81.26 113.45,80.35 115.35,80.35 115.35,80.8 114.95,80.8 114.16,81.59 114.16,82.54 114,82.7 114,84.7 113.9,84.8 112.1,84.8 112,84.7
P14V0 on Layer 1 "Layer 1-P14V0 1" (solid, pour order 145): 117,83.075 117.1,82.975 117.725,82.975 118.34,82.36 118.34,81.59 120.89,81.59 121.05,81.75 121.05,82.45 119.15,82.45 119,82.6 119,84.7 118.9,84.8 117.1,84.8 117,84.7
N14V0 on Layer 1 "Layer 1-N14V0 2" (solid, pour order 147): 17 vertices, not listed, extent 123.95,80.5 128.6,84.81
N14V0 on Layer 1 "Layer 1-N14V0 3" (solid, pour order 146): 17 vertices, not listed, extent 123.95,57 128.6,61.31
GND on Layer 1 "GND_L01_P149" (solid, pour order 149): 112.5,51.9 112.4,52 112.4,53.625 112.5,53.725 114.3,53.725 114.4,53.625 114.4,52 114.3,51.9
GND on Layer 1 "GND_L01_P148" (solid, pour order 148): 112.5,75.4 112.4,75.5 112.4,77.125 112.5,77.225 114.3,77.225 114.4,77.125 114.4,75.5 114.3,75.4
GND on Layer 1 "GND_L01_P151" (solid, pour order 151): 110.1,75.4 110,75.5 110,77.125 110.1,77.225 111.9,77.225 112,77.125 112,75.5 111.9,75.4
GND on Layer 1 "GND_L01_P150" (solid, pour order 150): 110.1,51.9 110,52 110,53.625 110.1,53.725 111.9,53.725 112,53.625 112,52 111.9,51.9
P14V0 on Layer 1 "Layer 1-P14V0 2" (solid, pour order 153): 20 vertices, not listed, extent 107.4,51.9 110.95,56
P14V0 on Layer 1 "Layer 1-P14V0 3" (solid, pour order 152): 20 vertices, not listed, extent 107.4,75.4 110.95,79.5
P3V3_DAC on Layer 1 "Layer 1-P3V3_DAC" (solid, pour order 155): 118.25,49.5 118.355,49.395 118.6,49.15 118.6,47.875 120.4,47.875 120.4,51.1 120.35,51.15 118.22,51.15 118.045,51.325 115.1,51.325 115,51.225 115,49.6 115.1,49.5
P3V3_DAC on Layer 1 "Layer 1-P3V3_DAC 1" (solid, pour order 154): 118.25,73 118.355,72.895 118.6,72.65 118.6,71.375 120.4,71.375 120.4,74.6 120.35,74.65 118.22,74.65 118.045,74.825 115.1,74.825 115,74.725 115,73.1 115.1,73
P14V0 on Layer 1 "Layer 1-P14V0 4" (solid, pour order 157): 117,52 117,52.6 117.3,52.9 117.87,52.9 118.27,53.3 120.35,53.3 120.35,53.75 115.125,53.75 115,53.625 115,52 115.1,51.9 116.9,51.9
P14V0 on Layer 1 "Layer 1-P14V0 5" (solid, pour order 156): 117,75.5 117,76.1 117.3,76.4 117.87,76.4 118.27,76.8 120.35,76.8 120.35,77.25 115.125,77.25 115,77.125 115,75.5 115.1,75.4 116.9,75.4
GND on Layer 1 "GND_L01_P159" (solid, pour order 159): 123,49.7 123.1,49.6 123.1,47.975 123,47.875 121.2,47.875 121.1,47.975 121.1,49.6 121.2,49.7
GND on Layer 1 "GND_L01_P158" (solid, pour order 158): 123,73.2 123.1,73.1 123.1,71.475 123,71.375 121.2,71.375 121.1,71.475 121.1,73.1 121.2,73.2
GND on Layer 1 "GND_L01_P161" (solid, pour order 161): 112.5,73 112.4,73.1 112.4,74.725 112.5,74.825 114.3,74.825 114.4,74.725 114.4,73.1 114.3,73
GND on Layer 1 "GND_L01_P160" (solid, pour order 160): 112.5,49.5 112.4,49.6 112.4,51.225 112.5,51.325 114.3,51.325 114.4,51.225 114.4,49.6 114.3,49.5
P14V0 on Layer 1 "Layer 1-P14V0 6" (solid, pour order 165): 117,59.575 117.1,59.475 117.725,59.475 118.34,58.86 118.34,58.09 120.89,58.09 121.05,58.25 121.05,58.95 119.15,58.95 119,59.1 119,61.2 118.9,61.3 117.1,61.3 117,61.2
ADC_DVDD on Layer 1 "ADC_DVDD_L01_P166" (solid, pour order 166): 126.3,69.25 126.64,69.59 126.64,70.31 127.26,70.31 127.95,71 127.95,71.3 128.85,71.3 128.975,71.175 128.975,67.9 128.825,67.75 126.3,67.75 128.825,67.75 126.3,67.75
ADC_AVDD on Layer 1 "ADC_AVDD_L01_P168" (solid, pour order 168): 122.4,63.936 122.3,64.036 122.3,65 122.4,65.1 122.9,65.1 123,65 123,63.8 122.85,63.65 122.85,61.95 122.4,61.95
GND on Layer 1 "GND_L01_P171" (solid, pour order 171): 130.825,67.9 132.6,67.9 132.8,68.1 132.8,69.5 132.6,69.7 130.825,69.7
GND on Layer 1 "GND_L01_P170" (solid, pour order 170): 94.148,49.909 95.407,48.65 102.925,48.65 102.925,50.975 102.4,51.5 99.5,51.5 98.351,52.649 94.148,52.649
GND on Layer 1 "GND_L01_P169" (solid, pour order 169): 94.148,23.709 95.407,22.45 102.925,22.45 102.925,26.375 101.6,27.7 94.8,27.7 94.148,27.047 94.148,26.449
GND on Layer 1 "GND_L01_P114" (solid, pour order 114): 18 vertices, not listed, extent 118.88,12.39 122.71,17.91
N14V0 on Layer 1 "N14V0_L01_P115" (solid, pour order 115): 118.76,12.39 118.76,13.46 118.825,13.525 118.825,14.55 118.425,14.95 116.1,14.95 116.1,12.7 116.41,12.39 118.14,12.39
N15V0 on Layer 1 "N15V0_L01_P116" (solid, pour order 116): 122.09,16.38 123.12,16.38 123.525,15.975 124.675,15.975 124.675,17.425 125,17.75 125,19.85 122,19.85 122,18.3 122.7,18.3 123.1,17.9 123.1,17.4 122.8,17.1 122.23,17.1 122.09,16.96
GND on Layer 1 "GND_L01_P117" (solid, pour order 117): 20 vertices, not listed, extent 124.475,11.75 136.7,17.475
NetD2_1 on Layer 1 "NETD2_1_L01_P118" (solid, pour order 118): 130.5,21.975 130.5,19.45 130,18.95 130,17.7 132.8,17.7 132.9,17.8 136,17.8 136.25,17.55 136.7,17.55 136.7,19.05 136.25,19.05 136,18.8 132.95,18.8 132.8,18.95 132.8,21.975
NetC31_2 on Layer 1 "NETC31_2_L01_P119" (solid, pour order 119): 127.175,17.425 126.8,17.8 126.8,19.1 124.75,21.15 122,21.15 122,22.7 125,22.7 125.725,21.975 128.5,21.975 128.925,21.55 128.925,17.425 127.475,17.425
NetC21_2 on Layer 1 "NETC21_2_L01_P120" (solid, pour order 120): 131.575,11.5 130.4,11.5 128.925,12.975 127.475,12.975 127.095,12.595 127.095,7.1 128.9,7.1 129.4,7.6 129.4,8.575 130.025,9.2 131.575,9.2
P15V0 on Layer 1 "P15V0_L01_P121" (solid, pour order 121): 122.98,7.49 123.61,7.49 124,7.1 125.705,7.1 125.925,7.32 125.925,12.975 124.475,12.975 124.475,9.025 123.56,8.11 122.98,8.11
NetD1_2 on Layer 1 "NETD1_2_L01_P122" (solid, pour order 122): 20 vertices, not listed, extent 130.025,4.85 137.35,13.25
NetIC5_3 on Layer 1 "NETIC5_3_L01_P123" (solid, pour order 123): 137.55,13.25 137.55,10.95 136.75,10.15 136.55,10.15 136.55,4.85 138.55,4.85 138.55,10.45 138,11 138,13.25
NetC30_2 on Layer 1 "NETC30_2_L01_P126" (solid, pour order 126): 121.885,14.44 121.425,14.9 120.375,14.9 120.375,15.5 121.57,15.5 122.09,16.02 122.71,16.02 122.71,14.44
GND on Layer 1 "GND_L01_P127" (solid, pour order 127): 20 vertices, not listed, extent 116.59,7.09 122.71,10.52
NetC23_2 on Layer 1 "NETC23_2_L01_P128" (solid, pour order 128): 122.62,7.49 122.71,7.58 122.71,9.26 120.485,9.26 120.375,9.15 120.375,7.725 120.61,7.49
P14V0 on Layer 1 "P14V0_L01_P129" (solid, pour order 129): 117.97,6.4 115.2,6.4 114.8,6.8 114.8,8 115.1,8.3 115.9,8.3 116.1,8.1 117.5,8.1 117.775,8.375 117.775,9.15 118.825,9.15 118.825,8.225 118.66,8.06 118.66,7.09
NetC13_1 on Layer 1 "Layer 1-NetC13_1" (solid, pour order 164): 24 vertices, not listed, extent 62.025,11.3 65.85,17.9
NetC12_1 on Layer 1 "NETC12_1_L01_P163" (solid, pour order 163): 62.025,8.838 62.288,8.575 64.125,8.575 64.45,8.25 64.45,3.65 64.8,3.3 65.5,3.3 65.85,3.65 65.85,9.55 65.5,9.9 64.05,9.9 63.775,9.625 62.288,9.625 62.025,9.363
GND on Layer 1 "Layer 1-GND_HV 1" (solid, pour order 162): 11.3,15.1 11.3,18.1 11.5,18.3 11.5,18.8 11.9,19.2 14.3,19.2 14.7,18.8 14.7,14.4 14.3,14 11.9,14 11.5,14.4 11.5,14.9
GND on Layer 1 "GND_L01_P132" (solid, pour order 132): 131.78,36.65 131.79,36.64 137.81,36.64 137.81,37.26 137.762,37.308 132.792,37.308 132.36,37.74 132.36,38.31 131.78,38.31
GND on Layer 1 "GND_L01_P131" (solid, pour order 131): 103.7,5.2 103.525,5.375 100.9,5.375 99.7,6.575 97.9,6.575 97.9,4.4 98.075,4.225 102.25,4.225 102.6,4.575 103.7,4.575
P12V0 on Layer 1 "P12V0_L01_P130" (solid, pour order 130): 97.375,3.575 97.1,3.3 97.1,1.8 97.5,1.4 101.2,1.4 101.9,2.1 103.4,2.1 103.7,2.4 103.7,3.225 102.6,3.225 102.25,3.575
P5V0_LC on Layer 1 "P5V0_LC_L01_P125" (solid, pour order 125): 28 vertices, not listed, extent 94.148,15.95 106.2,47.569
P12V0_IN on Layer 1 "P12V0_IN_L01_P124" (solid, pour order 124): 141.214,48.559 139.259,48.559 138.6,47.9 138.6,44.2 139.475,43.325 140.975,43.325 140.975,41.875 141.8,41.05 145.05,41.05 145.05,39.05 137.95,39.05 135.7,41.3 135.7,50.6 138.549,53.449 141.214,53.449
P5V0_SW on Layer 1 "P5V0_SW_L01_P113" (solid, pour order 113): 20 vertices, not listed, extent 101.15,3.625 107.61,8.15
P5V0 on Layer 1 "P5V0_L01_P112" (solid, pour order 112): 99.175,8.2 99.175,11.6 98.125,12.65 97.55,12.65 97.55,14.45 102.05,14.45 102.05,12.05 102.45,11.65 106.45,11.65 106.45,9.65 105.6,8.8 100.825,8.8 100.225,8.2
GND on Layer 6 "GND_L06_P226" (solid, remove dead copper, pour order 226): 0,0 0,7 10.5,7 10.5,79 0,79 0,86 148,86 148,0
P5V0A on Layer 6 "P5V0A_L06_P211" (solid, pour order 211): 121.55,62.1 121.55,60.45 123.5,58.5 123.5,53.5 123.2,53.2 120.3,53.2 120,53.5 120,61.45 120.65,62.1
P3V3 on Layer 6 "P3V3_L06_P196" (solid, pour order 196): 18 vertices, not listed, extent 128.9,54.9 146.8,72.3
P12V0 on Layer 6 "P12V0_L06_P187" (solid, pour order 187): 27 vertices, not listed, extent 96.7,0.9 139.5,44.8
ADC_AVDD on Layer 6 "ADC_AVDD_L06_P167" (solid, pour order 167): 124.775,63.4 123.7,63.4 123.3,63.8 123.3,65 123.2,65.1 122.4,65.1 122.3,65 122.3,63.5 122.44,63.36 122.44,62.29 122.25,62.1 122.25,61.1 124.275,61.1 124.775,61.6
GND on Layer 6 "GND_L06_P172" (solid, pour order 172): 126.625,63.4 128.4,63.4 128.6,63.2 128.6,61.8 128.4,61.6 126.625,61.6
GND on Layer 4 "GND_L04_P225" (solid, pour order 225): 0,0 0,7 10.5,7 10.5,79 0,79 0,86 148,86 148,0
P5V0A on Layer 4 "P5V0A_L04_P212" (solid, remove dead copper, pour order 212): 22 vertices, not listed, extent 120.7,34.6 133.5,65.2
GND on Layer 3 "GND_L03_P227" (solid, pour order 227): 0,0 0,7 10.5,7 10.5,79 0,79 0,86 148,86 148,0
GND on Layer 5 (split plane): 51 vertices, not listed, extent 0.51,0.51 147.49,85.49
N14V0 on Layer 5 (split plane): 126 vertices, not listed, extent 65.602,2.602 133.798,85.49
P14V0 on Layer 5 (split plane): 101 vertices, not listed, extent 70.302,6.302 128.798,85.49
GND on Layer 2 (split plane): 10.5,79.51 0.51,79.51 0.51,85.49 10.5,85.49
GND on Layer 2 (split plane): 299 vertices, not listed, extent 64.3,0.51 147.49,85.49
GND on Layer 2 (split plane): 16.2,0.51 0.51,0.51 0.51,6.49 10.5,6.49 10.6,6.499 10.695,6.528 10.784,6.576 10.861,6.639 10.924,6.716 10.972,6.805 11.001,6.9 11.01,7 11.01,21.5 16.2,21.5

## Other copper
Layer 4:
  pour cut-out: 118.6,58.6 116.7,60.5 116.7,62.3 115.37,63.63 115.4,63.66 115.4,64.5 115.675,64.775 120.825,64.775 121.1,64.5 121.1,63.3 121.9,62.5 123.8,62.5 123.8,60.9 120.7,57.8 118.6,57.8
  pour cut-out: 45.4,29.5 40.8,34.1 40.8,46.3 48.4,53.9 48.4,68.2 43.5,73.1 43.5,74.7 44.7,75.9 46.3,75.9 52.4,69.8 52.4,52.3 44.8,44.7 44.8,35.7 47,33.5 64.4,33.5 65.5,32.4 65.5,30.6 64.4,29.5 61.7,29.5
  pour cut-out: 44.4,13.3 34.1,23.6 34.1,51.4 41.7,59 46.1,59 47.3,57.8 47.3,56.2 46.1,55 43.3,55 38.1,49.8 38.1,25.2 46,17.3 52.4,17.3 59.7,24.6 64.5,24.6 65.7,23.4 65.7,21.9 64.4,20.6 61.3,20.6 54,13.3
Layer 6:
  pour cut-out: 145.539,47.861 145.4,48 144.8,48
  pour cut-out: 106.44,40.66 96.1,51 95.5,50.4 105.9,40
Layer 2 (plane layer: these items are gaps in the copper):
  region: 16.2,0 16.2,21.5 10.5,21.5 10.5,86.5 64.3,86.5 64.3,55.2 81.3,55.2 81.3,45 78.3,45 78.3,18.5 81.3,18.5 81.3,0
Layer 5 (plane layer: these items are gaps in the copper):
  lines w0.2: 65.5,86 65.5,61.5 70.2,56.8 96.8,56.8 99,54.6 99,4.7 101.2,2.5 121.1,2.5 125,6.4 125,34.9 133.9,43.8 133.9,86.1 ; 114.2,86 114.2,84.1 113.7,83.6 112.9,83.6 107.7,78.4 87.9,78.4 85.6,80.7 72.1,80.7 70.4,79 70.4,77.4 71.5,76.3 71.5,73.9 70.2,72.6 70.2,63.6 72.3,61.5 87.2,61.5 87.7,62 87.7,63.9 88.2,64.4 88.2,65.8 84.7,69.3 84.3,69.3 82.3,71.3 82.3,73.7 83.7,75.1 85.8,75.1 92,68.9 101.3,68.9 104.8,65.4 104.8,7.7 106.3,6.2 116.2,6.2 116.5,6.5 116.5,9.5 115.7,10.3 115.7,12.5 115.7,36.4 127.4,48.1 127.4,55.3 125.4,57.3 113.5,57.3 111.7,59.1 111.7,61.4 112.2,61.9 116,61.9 116.6,61.3 116.6,60.7 116.9,60.4 122.3,60.4 128.7,60.4 128.9,60.6 128.9,63.3 125.8,66.4 ; 125.8,69.3 125.8,66.4 ; 125.8,86 125.8,66.4
  lines w4: 45.305,57 42.5,57 36.1,50.6 36.1,24.4 45.2,15.3 53.2,15.3 60.5,22.6 63.75,22.6 ; 45.5,73.9 50.4,69 50.4,53.1 42.8,45.5 42.8,34.9 45.5,32.2 46.2,31.5 63.75,31.5

## Silkscreen, mask and mechanical layers (free items; w line width, h text height)
Top Overlay:
  drawing of 46 lines, arcs and shapes, not listed
  text "HV DAC" at 133.444,78.203 h1.5
  text "WUT ISE 2025" at 133.3,76.4 h1.02
  text "CH1" at 11.6,74.9 h1.02
  text "HIGH" at 58.7,54.5 h1.5
  text "VOLTAGE" at 56.436,52.3 h1.5
  text "CH2" at 11.6,37.7 h1.02
  text "ADC DAC  / REF" at 100.827,35.3 h1
  text "Thermistor / CH1" at 130.4,32.57 h1 r90
  text "+2kV" at 58.8,31 h1.02
  text "DIVIDER / 1" at 100.827,29.918 h1
  text "Thermistor / CH2" at 130.5,25.27 h1 r90
  text "DIVIDER / 2" at 100.827,24.468 h1
  text "-2kV" at 58.8,22.1 h1.02
  text "N14V0" at 111.2,12.2 h1.02
  text "P14V0" at 109.9,7 h1.02
  text "HIGH" at 55.897,5.115 h1.5
  text "VOLTAGE" at 53.633,2.915 h1.5
Mechanical 1:
  lines w0.1: 141.964,59.004 142,59.004 ; 0,0 0,7 10.5,7 10.5,79 0,79 0,86 148,86 148,0 0,0